# EAGLE board SOL_AMPV2 (EAGLE 7.4.0), part 1 of 2
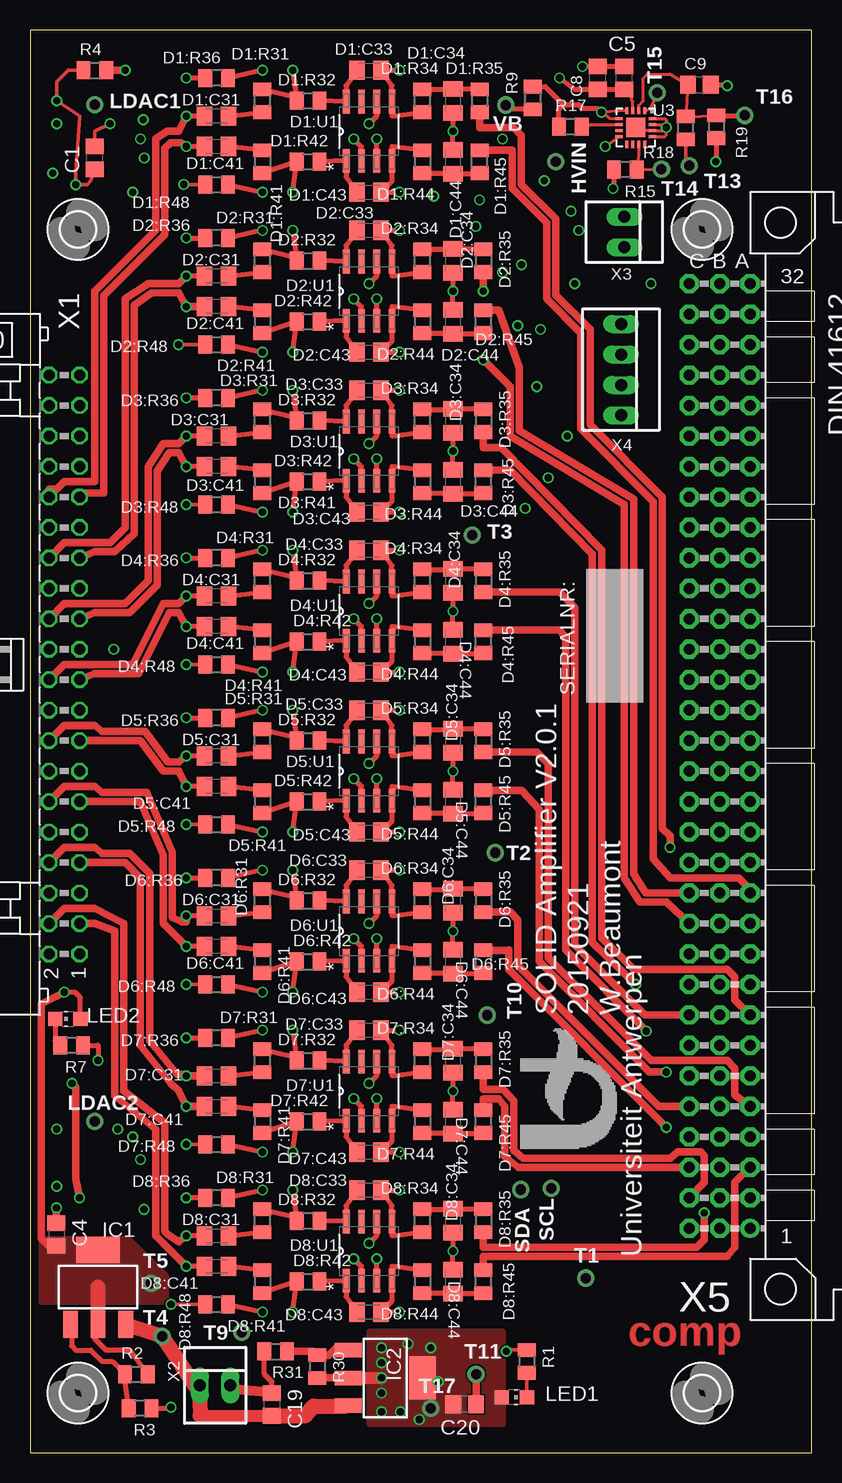
[diagram p0: board, top side]
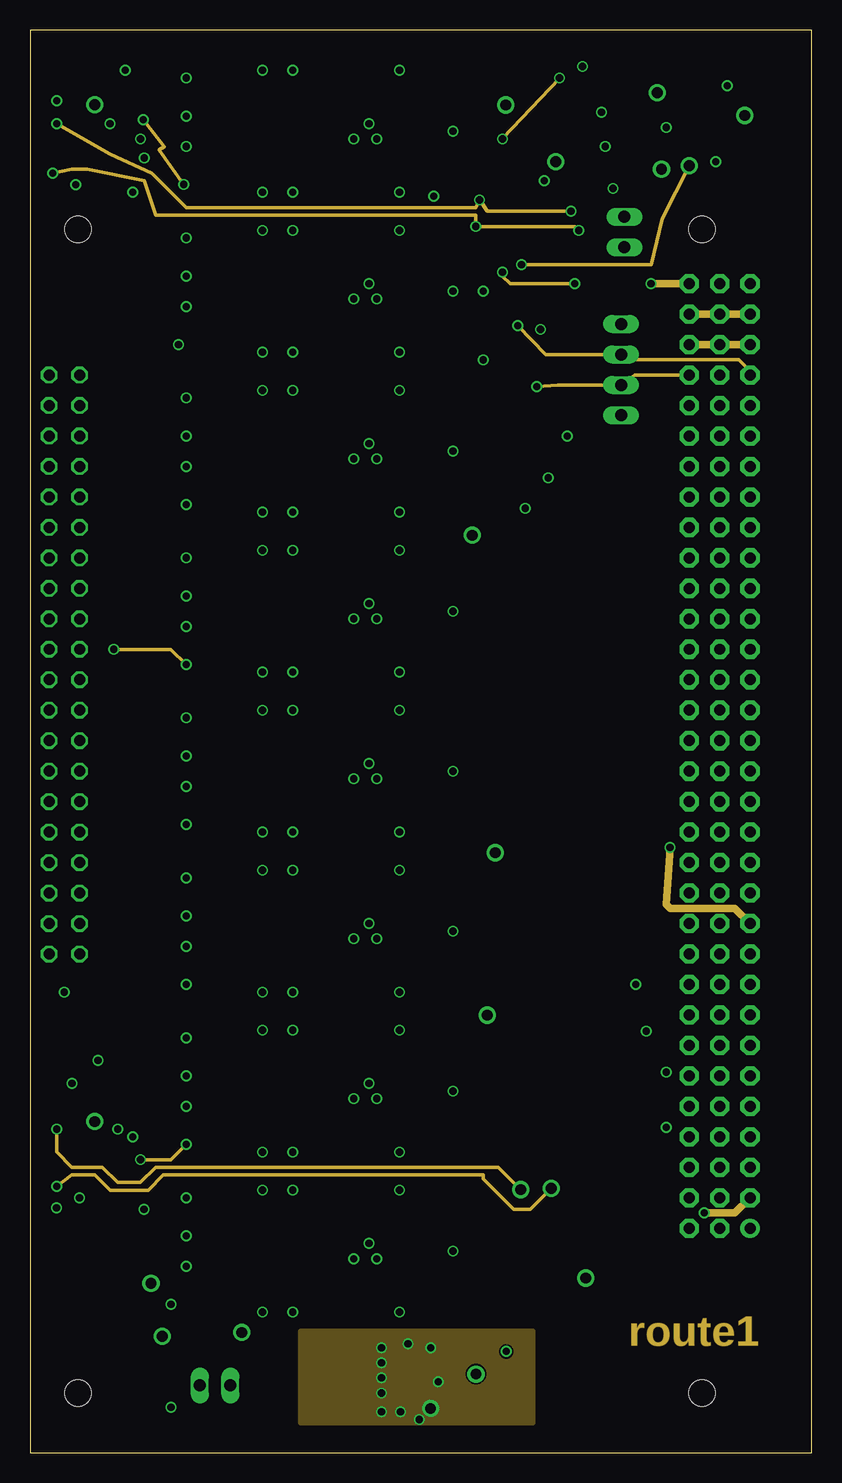
[diagram p1: board, inner layer Route2]
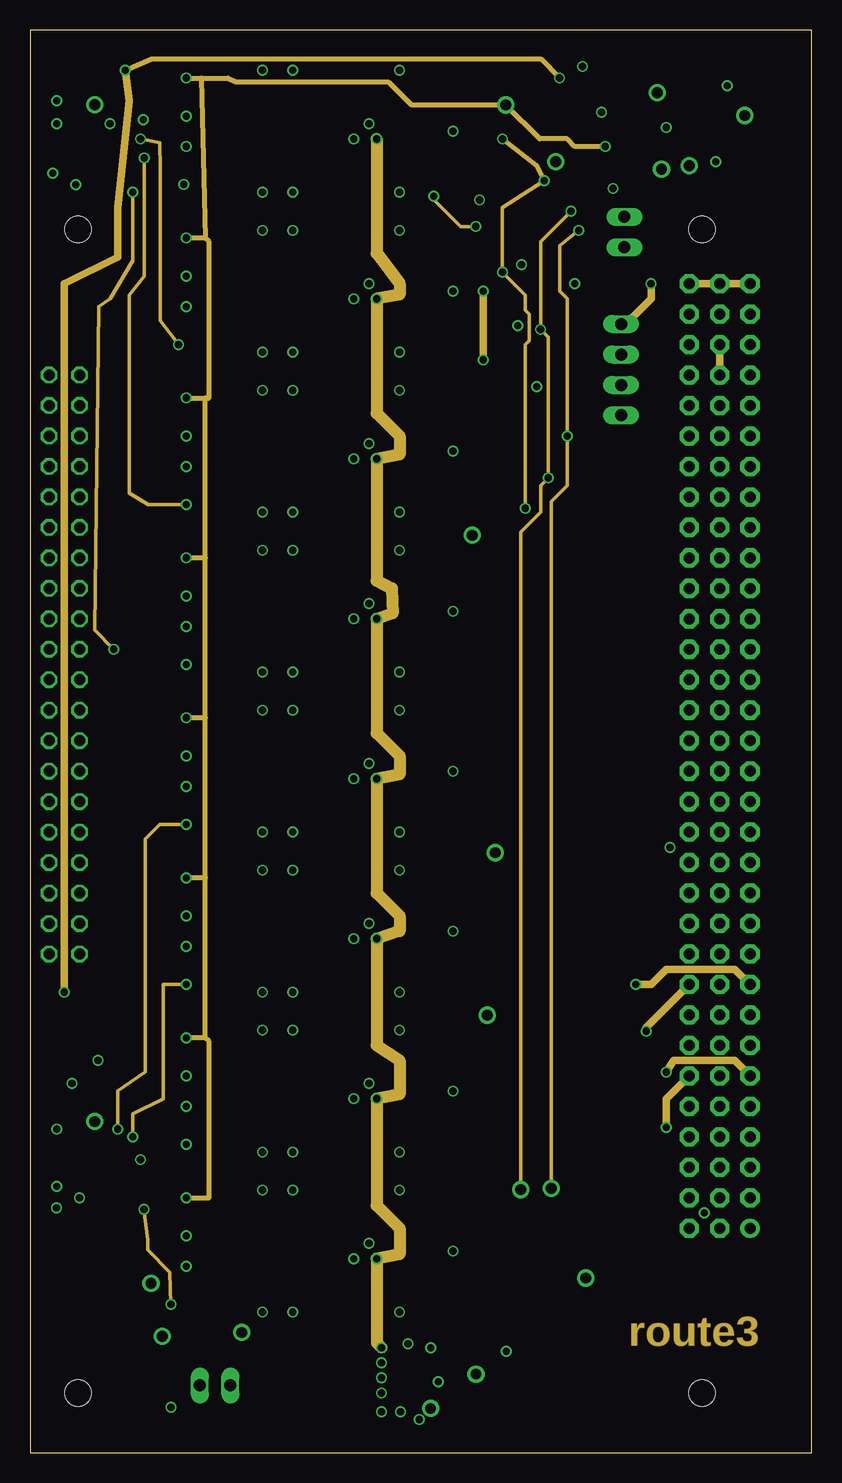
[diagram p2: board, inner layer Route3]
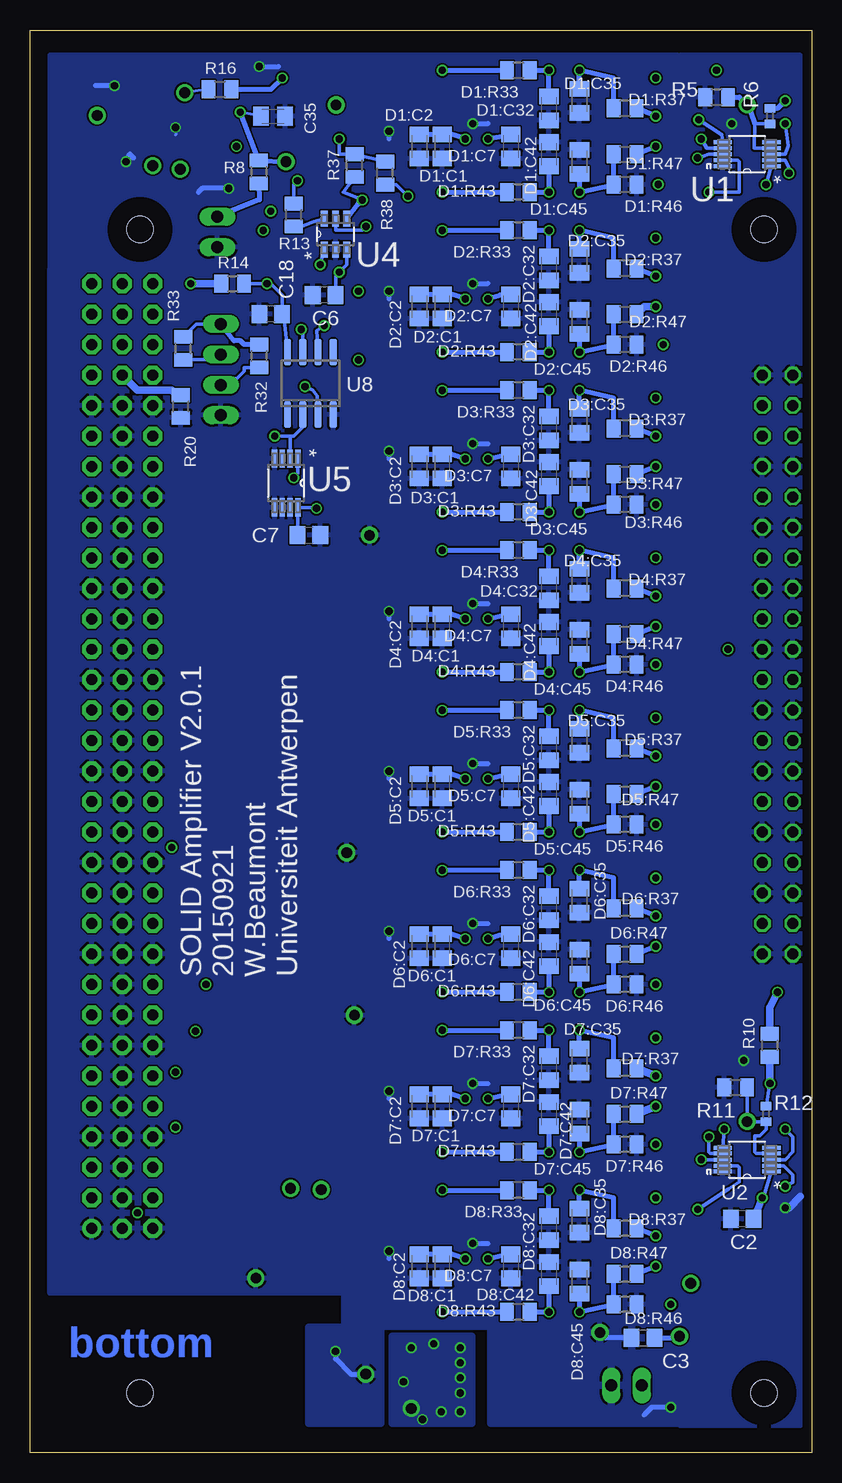
[diagram p3: board, bottom side, seen from below]

Size 65.15 x 118.62 mm. Coordinates in mm from the lower left corner, seen from the top.
Outline: 0,0 65.15,0 65.15,118.62 0,118.62 0,0
Copper layers (1+2*3+16): Top 0.018mm / dielectric 0.36mm / Route2 0.035mm / dielectric 0.71mm / Route3 0.035mm / dielectric 0.36mm / Bottom 0.018mm
Design rules "eC_4Layer_PClass6_BaseCopperO18-I35_eCDefault": minimum track width 0.15mm, minimum drill 0.35mm, track to track 0.15mm, track to pad 0.15mm, pad to pad 0.15mm, via to via 0.15mm, smd to smd 0mil, copper to edge 0.25mm, drill to drill 0.35mm, minimum pad ring 0.175mm, minimum via ring 0.125mm, stop-mask expansion 0mil, vias tented up to drill 0.45mm, thermal gap 0.2mm

## Footprints (pad centres in the part's own frame; a part is rotated, then mirrored left to right if it is on the bottom)
C0805 = smd 1.3 x 1.5: 1 -0.95,0; 2 0.95,0
C0805K = smd 1.3 x 1.6: 1 -1,0; 2 1,0
R0805H = smd 1.143 x 1.5: 1 -0.95,0; 2 0.95,0
SOIC127P600X175-8N = smd 1.981 x 0.559: 1 -2.464,1.905; 2 -2.464,0.635; 3 -2.464,-0.635; 4 -2.464,-1.905; 5 2.464,-1.905; 6 2.464,-0.635; 7 2.464,0.635; 8 2.464,1.905
2,1 = hole 2.2: 0,0
UA_P1-13 = drill 0.9 pad 1.422: TP 0,0
SOT223 = smd 1.219 x 2.235: 1 -2.311,-3.099; 2 0,-3.099; 3 2.311,-3.099 | smd 3.6 x 2.2: 4 0,3.099
CHIP-LED0805 = smd 1.2 x 1.2: A 0,-1.05; C 0,1.05
R0402 = smd 0.7 x 0.9: 1 -0.65,0; 2 0.65,0
SOP50P490X110-10N = smd 1.524 x 0.33: 1 -2.032,0.991; 2 -2.032,0.508; 3 -2.032,0; 4 -2.032,-0.508; 5 -2.032,-0.991; 6 2.032,-0.991; 7 2.032,-0.508; 8 2.032,0; 9 2.032,0.508; 10 2.032,0.991
LFCSP_LQ-16_MANSOL = smd 0.61 x 0.25: 1 -1.405,0.75; 2 -1.405,0.25; 3 -1.405,-0.25; 4 -1.405,-0.75; 9 1.405,-0.75; 10 1.405,-0.25; 11 1.405,0.25; 12 1.405,0.75 | smd 0.25 x 0.61: 5 -0.75,-1.405; 6 -0.25,-1.405; 7 0.25,-1.405; 8 0.75,-1.405; 13 0.75,1.405; 14 0.25,1.405; 15 -0.25,1.405; 16 -0.75,1.405 | smd 1.6 x 1.6: EXP 0,0
SOT95P270X145-6N = smd 1.321 x 0.559: 1 -1.295,0.94; 2 -1.295,0; 3 -1.295,-0.94; 4 1.295,-0.94; 5 1.295,0; 6 1.295,0.94
SOP65P490X110-8N = smd 1.524 x 0.457: 1 -2.032,0.965; 2 -2.032,0.33; 3 -2.032,-0.33; 4 -2.032,-0.965; 5 2.032,-0.965; 6 2.032,-0.33; 7 2.032,0.33; 8 2.032,0.965
SO8 = smd 0.6 x 2.2: 1 -1.905,-2.6; 2 -0.635,-2.6; 3 0.635,-2.6; 4 1.905,-2.6; 5 1.905,2.6; 6 0.635,2.6; 7 -0.635,2.6; 8 -1.905,2.6
ML40L = drill 0.914 octagon: 1 -24.13,-1.27; 2 -24.13,1.27; 3 -21.59,-1.27; 4 -21.59,1.27; 5 -19.05,-1.27; 6 -19.05,1.27; 7 -16.51,-1.27; 8 -16.51,1.27; 9 -13.97,-1.27; 10 -13.97,1.27; 11 -11.43,-1.27; 12 -11.43,1.27; 13 -8.89,-1.27; 14 -8.89,1.27; 15 -6.35,-1.27; 16 -6.35,1.27; 17 -3.81,-1.27; 18 -3.81,1.27; 19 -1.27,-1.27; 20 -1.27,1.27; 21 1.27,-1.27; 22 1.27,1.27; 23 3.81,-1.27; 24 3.81,1.27; 25 6.35,-1.27; 26 6.35,1.27; 27 8.89,-1.27; 28 8.89,1.27; 29 11.43,-1.27; 30 11.43,1.27; 31 13.97,-1.27; 32 13.97,1.27; 33 16.51,-1.27; 34 16.51,1.27; 35 19.05,-1.27; 36 19.05,1.27; 37 21.59,-1.27; 38 21.59,1.27; 39 24.13,-1.27; 40 24.13,1.27
22-23-2021 = drill 1 long: 1 -1.27,0; 2 1.27,0
22-23-2041 = drill 1 long: 1 -3.81,0; 2 -1.27,0; 3 1.27,0; 4 3.81,0
DIN41612_96RC = drill 0.914 pad 1.6: A1 2.54,-39.37 | drill 0.914 pad 1.6 octagon: A2 2.54,-36.83; A3 2.54,-34.29; A4 2.54,-31.75; A5 2.54,-29.21; A6 2.54,-26.67; A7 2.54,-24.13; A8 2.54,-21.59; A9 2.54,-19.05; A10 2.54,-16.51; A11 2.54,-13.97; A12 2.54,-11.43; A13 2.54,-8.89; A14 2.54,-6.35; A15 2.54,-3.81; A16 2.54,-1.27; A17 2.54,1.27; A18 2.54,3.81; A19 2.54,6.35; A20 2.54,8.89; A21 2.54,11.43; A22 2.54,13.97; A23 2.54,16.51; A24 2.54,19.05; A25 2.54,21.59; A26 2.54,24.13; A27 2.54,26.67; A28 2.54,29.21; A29 2.54,31.75; A30 2.54,34.29; A31 2.54,36.83; A32 2.54,39.37; B1 0,-39.37; B2 0,-36.83; B3 0,-34.29; B4 0,-31.75; B5 0,-29.21; B6 0,-26.67; B7 0,-24.13; B8 0,-21.59; B9 0,-19.05; B10 0,-16.51; B11 0,-13.97; B12 0,-11.43; B13 0,-8.89; B14 0,-6.35; B15 0,-3.81; B16 0,-1.27; B17 0,1.27; B18 0,3.81; B19 0,6.35; B20 0,8.89; B21 0,11.43; B22 0,13.97; B23 0,16.51; B24 0,19.05; B25 0,21.59; B26 0,24.13; B27 0,26.67; B28 0,29.21; B29 0,31.75; B30 0,34.29; B31 0,36.83; B32 0,39.37; C1 -2.54,-39.37; C2 -2.54,-36.83; C3 -2.54,-34.29; C4 -2.54,-31.75; C5 -2.54,-29.21; C6 -2.54,-26.67; C7 -2.54,-24.13; C8 -2.54,-21.59; C9 -2.54,-19.05; C10 -2.54,-16.51; C11 -2.54,-13.97; C12 -2.54,-11.43; C13 -2.54,-8.89; C14 -2.54,-6.35; C15 -2.54,-3.81; C16 -2.54,-1.27; C17 -2.54,1.27; C18 -2.54,3.81; C19 -2.54,6.35; C20 -2.54,8.89; C21 -2.54,11.43; C22 -2.54,13.97; C23 -2.54,16.51; C24 -2.54,19.05; C25 -2.54,21.59; C26 -2.54,24.13; C27 -2.54,26.67; C28 -2.54,29.21; C29 -2.54,31.75; C30 -2.54,34.29; C31 -2.54,36.83; C32 -2.54,39.37

## Placement (x,y rotation side)
C1  10u  [C0805]  5.4,107.95 90 top
C2  10u  [C0805]  5.79,19.51 180 bottom
C3  10uF  [C0805]  14.06,9.59 0 bottom
C4  10uF  [C0805]  2.21,18.22 270 top
C5  10n  [C0805]  49.53,114.62 90 top
C6  10n  [C0805]  40.64,96.52 180 bottom
C7  10n  [C0805]  41.91,76.52 0 bottom
C8  100n  [C0805]  47.31,114.62 90 top
C9  10n  [C0805]  55.78,114.05 0 top
C18  10n  [C0805]  45.09,94.93 180 bottom
C19  10uF  [C0805]  20.16,4.05 270 top
C20  10uF  [C0805]  36.22,4.05 180 top
C35  100nF /100V  [C0805K]  44.9,111.42 0 bottom
D1:C1  100n  [C0805K]  30.8,108.9 90 bottom
D1:C2  10n  [C0805K]  32.7,108.9 90 bottom
D1:C7  10n  [C0805K]  25.08,108.9 270 bottom
D1:C31  4.4n/100V  [C0805K]  15.56,111.44 180 top
D1:C32  152p  [C0805K]  21.91,112.08 90 bottom
D1:C33  21p  [C0805K]  28.26,115.25 0 top
D1:C34  x  [C0805K]  35.24,112.71 90 top
D1:C35  100nF /100V  [C0805K]  19.37,112.71 270 bottom
D1:C41  4.4n  [C0805K]  15.56,108.9 180 top
D1:C42  152p  [C0805K]  21.91,108.27 270 bottom
D1:C43  21p  [C0805K]  28.26,105.09 0 top
D1:C44  x  [C0805K]  35.24,107.63 270 top
D1:C45  100nF /100V  [C0805K]  19.37,107.63 90 bottom
D1:R31  27  [R0805H]  19.37,112.71 90 top
D1:R32  24  [R0805H]  23.18,112.71 0 top
D1:R33  3K  [R0805H]  24.45,115.25 180 bottom
D1:R34  1  [R0805H]  32.7,112.71 90 top
D1:R35  1  [R0805H]  37.47,112.71 270 top
D1:R36  10K  [R0805H]  15.56,114.62 180 top
D1:R37  100K  [R0805H]  15.56,112.08 180 bottom
D1:R41  27  [R0805H]  19.37,107.63 270 top
D1:R42  24  [R0805H]  23.18,107.63 0 top
D1:R43  3K  [R0805H]  24.45,105.09 180 bottom
D1:R44  1  [R0805H]  32.7,107.63 270 top
D1:R45  1  [R0805H]  37.47,107.63 90 top
D1:R46  10K  [R0805H]  15.56,105.73 180 bottom
D1:R47  100K  [R0805H]  15.56,108.27 0 bottom
D1:R48  470  [R0805H]  15.56,105.73 0 top
D1:U1  AD8132ARZ  [SOIC127P600X175-8N]  28.26,110.17 90 top
D2:C1  100n  [C0805K]  30.8,95.57 90 bottom
D2:C2  10n  [C0805K]  32.7,95.57 90 bottom
D2:C7  10n  [C0805K]  25.08,95.57 270 bottom
D2:C31  4.4n/100V  [C0805K]  15.56,98.11 180 top
D2:C32  152p  [C0805K]  21.91,98.74 90 bottom
D2:C33  21p  [C0805K]  28.26,101.92 0 top
D2:C34  x  [C0805K]  35.24,99.38 90 top
D2:C35  100nF /100V  [C0805K]  19.37,99.38 270 bottom
D2:C41  4.4n  [C0805K]  15.56,95.57 180 top
D2:C42  152p  [C0805K]  21.91,94.93 270 bottom
D2:C43  21p  [C0805K]  28.26,91.76 0 top
D2:C44  x  [C0805K]  35.24,94.3 270 top
D2:C45  100nF /100V  [C0805K]  19.37,94.3 90 bottom
D2:R31  27  [R0805H]  19.37,99.38 90 top
D2:R32  24  [R0805H]  23.18,99.38 0 top
D2:R33  3K  [R0805H]  24.45,101.92 180 bottom
D2:R34  1  [R0805H]  32.7,99.38 90 top
D2:R35  1  [R0805H]  37.78,99.38 270 top
D2:R36  10K  [R0805H]  15.56,101.28 180 top
D2:R37  100K  [R0805H]  15.56,98.74 180 bottom
D2:R41  27  [R0805H]  19.37,94.3 270 top
D2:R42  24  [R0805H]  23.18,94.3 0 top
D2:R43  3K  [R0805H]  24.45,91.76 180 bottom
D2:R44  1  [R0805H]  32.7,94.3 270 top
D2:R45  1  [R0805H]  37.78,94.3 90 top
D2:R46  10K  [R0805H]  15.56,92.39 180 bottom
D2:R47  100K  [R0805H]  15.56,94.93 0 bottom
D2:R48  470  [R0805H]  15.56,92.39 0 top
D2:U1  AD8132ARZ  [SOIC127P600X175-8N]  28.26,96.84 90 top
D3:C1  100n  [C0805K]  30.8,82.23 90 bottom
D3:C2  10n  [C0805K]  32.7,82.23 90 bottom
D3:C7  10n  [C0805K]  25.08,82.23 270 bottom
D3:C31  4.4n/100V  [C0805K]  15.56,84.77 180 top
D3:C32  152p  [C0805K]  21.91,85.41 90 bottom
D3:C33  21p  [C0805K]  28.26,88.58 0 top
D3:C34  x  [C0805K]  35.24,86.04 90 top
D3:C35  100nF /100V  [C0805K]  19.37,86.04 270 bottom
D3:C41  4.4n  [C0805K]  15.56,82.23 180 top
D3:C42  152p  [C0805K]  21.91,81.6 270 bottom
D3:C43  21p  [C0805K]  28.26,78.42 0 top
D3:C44  x  [C0805K]  35.24,80.96 270 top
D3:C45  100nF /100V  [C0805K]  19.37,80.96 90 bottom
D3:R31  27  [R0805H]  19.37,86.04 90 top
D3:R32  24  [R0805H]  23.18,86.04 0 top
D3:R33  3K  [R0805H]  24.45,88.58 180 bottom
D3:R34  1  [R0805H]  32.7,86.04 90 top
D3:R35  1  [R0805H]  37.78,86.04 270 top
D3:R36  10K  [R0805H]  15.56,87.95 180 top
D3:R37  100K  [R0805H]  15.56,85.41 180 bottom
D3:R41  27  [R0805H]  19.37,80.96 270 top
D3:R42  24  [R0805H]  23.18,80.96 0 top
D3:R43  3K  [R0805H]  24.45,78.42 180 bottom
D3:R44  1  [R0805H]  32.7,80.96 270 top
D3:R45  1  [R0805H]  37.78,80.96 90 top
D3:R46  10K  [R0805H]  15.56,79.06 180 bottom
D3:R47  100K  [R0805H]  15.56,81.6 0 bottom
D3:R48  470  [R0805H]  15.56,79.06 0 top
D3:U1  AD8132ARZ  [SOIC127P600X175-8N]  28.26,83.5 90 top
D4:C1  100n  [C0805K]  30.8,68.9 90 bottom
D4:C2  10n  [C0805K]  32.7,68.9 90 bottom
D4:C7  10n  [C0805K]  25.08,68.9 270 bottom
D4:C31  4.4n/100V  [C0805K]  15.56,71.44 180 top
D4:C32  152p  [C0805K]  21.91,72.07 90 bottom
D4:C33  21p  [C0805K]  28.26,75.25 0 top
D4:C34  x  [C0805K]  35.24,72.71 90 top
D4:C35  100nF /100V  [C0805K]  19.37,72.71 270 bottom
D4:C41  4.4n  [C0805K]  15.56,68.9 180 top
D4:C42  152p  [C0805K]  21.91,68.26 270 bottom
D4:C43  21p  [C0805K]  28.26,65.09 0 top
D4:C44  x  [C0805K]  35.24,67.63 270 top
D4:C45  100nF /100V  [C0805K]  19.37,67.63 90 bottom
D4:R31  27  [R0805H]  19.37,72.71 90 top
D4:R32  24  [R0805H]  23.18,72.71 0 top
D4:R33  3K  [R0805H]  24.45,75.25 180 bottom
D4:R34  1  [R0805H]  32.7,72.71 90 top
D4:R35  1  [R0805H]  37.78,72.71 270 top
D4:R36  10K  [R0805H]  15.56,74.61 180 top
D4:R37  100K  [R0805H]  15.56,72.07 180 bottom
D4:R41  27  [R0805H]  19.37,67.63 270 top
D4:R42  24  [R0805H]  23.18,67.63 0 top
D4:R43  3K  [R0805H]  24.45,65.09 180 bottom
D4:R44  1  [R0805H]  32.7,67.63 270 top
D4:R45  1  [R0805H]  37.78,67.63 90 top
D4:R46  10K  [R0805H]  15.56,65.72 180 bottom
D4:R47  100K  [R0805H]  15.56,68.26 0 bottom
D4:R48  470  [R0805H]  15.56,65.72 0 top
D4:U1  AD8132ARZ  [SOIC127P600X175-8N]  28.26,70.17 90 top
D5:C1  100n  [C0805K]  30.8,55.56 90 bottom
D5:C2  10n  [C0805K]  32.7,55.56 90 bottom
D5:C7  10n  [C0805K]  25.08,55.56 270 bottom
D5:C31  4.4n/100V  [C0805K]  15.56,58.1 180 top
D5:C32  152p  [C0805K]  21.91,58.74 90 bottom
D5:C33  21p  [C0805K]  28.26,61.91 0 top
D5:C34  x  [C0805K]  35.24,59.37 90 top
D5:C35  100nF /100V  [C0805K]  19.37,59.37 270 bottom
D5:C41  4.4n  [C0805K]  15.56,55.56 180 top
D5:C42  152p  [C0805K]  21.91,54.93 270 bottom
D5:C43  21p  [C0805K]  28.26,51.75 0 top
D5:C44  x  [C0805K]  35.24,54.29 270 top
D5:C45  100nF /100V  [C0805K]  19.37,54.29 90 bottom
D5:R31  27  [R0805H]  19.37,59.37 90 top
D5:R32  24  [R0805H]  23.18,59.37 0 top
D5:R33  3K  [R0805H]  24.45,61.91 180 bottom
D5:R34  1  [R0805H]  32.7,59.37 90 top
D5:R35  1  [R0805H]  37.78,59.37 270 top
D5:R36  10K  [R0805H]  15.56,61.28 180 top
D5:R37  100K  [R0805H]  15.56,58.74 180 bottom
D5:R41  27  [R0805H]  19.37,54.29 270 top
D5:R42  24  [R0805H]  23.18,54.29 0 top
D5:R43  3K  [R0805H]  24.45,51.75 180 bottom
D5:R44  1  [R0805H]  32.7,54.29 270 top
D5:R45  1  [R0805H]  37.78,54.29 90 top
D5:R46  10K  [R0805H]  15.56,52.39 180 bottom
D5:R47  100K  [R0805H]  15.56,54.93 0 bottom
D5:R48  470  [R0805H]  15.56,52.39 0 top
D5:U1  AD8132ARZ  [SOIC127P600X175-8N]  28.26,56.83 90 top
D6:C1  100n  [C0805K]  30.8,42.23 90 bottom
D6:C2  10n  [C0805K]  32.7,42.23 90 bottom
D6:C7  10n  [C0805K]  25.08,42.23 270 bottom
D6:C31  4.4n/100V  [C0805K]  15.56,44.77 180 top
D6:C32  152p  [C0805K]  21.91,45.4 90 bottom
D6:C33  21p  [C0805K]  28.26,48.58 0 top
D6:C34  x  [C0805K]  35.24,46.04 90 top
D6:C35  100nF /100V  [C0805K]  19.37,46.04 270 bottom
D6:C41  4.4n  [C0805K]  15.56,42.23 180 top
D6:C42  152p  [C0805K]  21.91,41.59 270 bottom
D6:C43  21p  [C0805K]  28.26,38.42 0 top
D6:C44  x  [C0805K]  35.24,40.96 270 top
D6:C45  100nF /100V  [C0805K]  19.37,40.96 90 bottom
D6:R31  27  [R0805H]  19.37,46.04 90 top
D6:R32  24  [R0805H]  23.18,46.04 0 top
D6:R33  3K  [R0805H]  24.45,48.58 180 bottom
D6:R34  1  [R0805H]  32.7,46.04 90 top
D6:R35  1  [R0805H]  37.78,46.04 270 top
D6:R36  10K  [R0805H]  15.56,47.94 180 top
D6:R37  100K  [R0805H]  15.56,45.4 180 bottom
D6:R41  27  [R0805H]  19.37,40.96 270 top
D6:R42  24  [R0805H]  23.18,40.96 0 top
D6:R43  3K  [R0805H]  24.45,38.42 180 bottom
D6:R44  1  [R0805H]  32.7,40.96 270 top
D6:R45  1  [R0805H]  37.78,40.96 90 top
D6:R46  10K  [R0805H]  15.56,39.05 180 bottom
D6:R47  100K  [R0805H]  15.56,41.59 0 bottom
D6:R48  470  [R0805H]  15.56,39.05 0 top
D6:U1  AD8132ARZ  [SOIC127P600X175-8N]  28.26,43.5 90 top
D7:C1  100n  [C0805K]  30.8,28.89 90 bottom
D7:C2  10n  [C0805K]  32.7,28.89 90 bottom
D7:C7  10n  [C0805K]  25.08,28.89 270 bottom
D7:C31  4.4n/100V  [C0805K]  15.56,31.43 180 top
D7:C32  152p  [C0805K]  21.91,32.07 90 bottom
D7:C33  21p  [C0805K]  28.26,35.24 0 top
D7:C34  x  [C0805K]  35.24,32.7 90 top
D7:C35  100nF /100V  [C0805K]  19.37,32.7 270 bottom
D7:C41  4.4n  [C0805K]  15.56,28.89 180 top
D7:C42  152p  [C0805K]  21.91,28.26 270 bottom
D7:C43  21p  [C0805K]  28.26,25.08 0 top
D7:C44  x  [C0805K]  35.24,27.62 270 top
D7:C45  100nF /100V  [C0805K]  19.37,27.62 90 bottom
D7:R31  27  [R0805H]  19.37,32.7 90 top
D7:R32  24  [R0805H]  23.18,32.7 0 top
D7:R33  3K  [R0805H]  24.45,35.24 180 bottom
D7:R34  1  [R0805H]  32.7,32.7 90 top
D7:R35  1  [R0805H]  37.78,32.7 270 top
D7:R36  10K  [R0805H]  15.56,34.61 180 top
D7:R37  100K  [R0805H]  15.56,32.07 180 bottom
D7:R41  27  [R0805H]  19.37,27.62 270 top
D7:R42  24  [R0805H]  23.18,27.62 0 top
D7:R43  3K  [R0805H]  24.45,25.08 180 bottom
D7:R44  1  [R0805H]  32.7,27.62 270 top
D7:R45  1  [R0805H]  37.78,27.62 90 top
D7:R46  10K  [R0805H]  15.56,25.72 180 bottom
D7:R47  100K  [R0805H]  15.56,28.26 0 bottom
D7:R48  470  [R0805H]  15.56,25.72 0 top
D7:U1  AD8132ARZ  [SOIC127P600X175-8N]  28.26,30.16 90 top
D8:C1  100n  [C0805K]  30.8,15.56 90 bottom
D8:C2  10n  [C0805K]  32.7,15.56 90 bottom
D8:C7  10n  [C0805K]  25.08,15.56 270 bottom
D8:C31  4.4n/100V  [C0805K]  15.56,18.1 180 top
D8:C32  152p  [C0805K]  21.91,18.73 90 bottom
D8:C33  21p  [C0805K]  28.26,21.91 0 top
D8:C34  x  [C0805K]  35.24,19.37 90 top
D8:C35  100nF /100V  [C0805K]  19.37,19.37 270 bottom
D8:C41  4.4n  [C0805K]  15.56,15.56 180 top
D8:C42  152p  [C0805K]  21.91,14.92 270 bottom
D8:C43  21p  [C0805K]  28.26,11.75 0 top
D8:C44  x  [C0805K]  35.24,14.29 270 top
D8:C45  100nF /100V  [C0805K]  19.37,14.29 90 bottom
D8:R31  27  [R0805H]  19.37,19.37 90 top
D8:R32  24  [R0805H]  23.18,19.37 0 top
D8:R33  3K  [R0805H]  24.45,21.91 180 bottom
D8:R34  1  [R0805H]  32.7,19.37 90 top
D8:R35  1  [R0805H]  37.78,19.37 270 top
D8:R36  10K  [R0805H]  15.56,21.27 180 top
D8:R37  100K  [R0805H]  15.56,18.73 180 bottom
D8:R41  27  [R0805H]  19.37,14.29 270 top
D8:R42  24  [R0805H]  23.18,14.29 0 top
D8:R43  3K  [R0805H]  24.45,11.75 180 bottom
D8:R44  1  [R0805H]  32.7,14.29 270 top
D8:R45  1  [R0805H]  37.78,14.29 90 top
D8:R46  10K  [R0805H]  15.56,12.38 180 bottom
D8:R47  100K  [R0805H]  15.56,14.92 0 bottom
D8:R48  470  [R0805H]  15.56,12.38 0 top
D8:U1  AD8132ARZ  [SOIC127P600X175-8N]  28.26,16.83 90 top
H1  [2,1]  4,5 0 top
H2  [2,1]  56,5 0 top
H3  [2,1]  4,102 0 top
H4  [2,1]  56,102 0 top
HVIN  UA_TPPAD1-13  [UA_P1-13]  43.81,107.63 0 top
IC1  LM1117  [SOT223]  5.67,13.82 0 top
IC2  LM1117  [SOT223]  29.61,6.26 270 top
LDAC1  UA_TPPAD1-13  [UA_P1-13]  5.4,112.39 0 top
LDAC2  UA_TPPAD1-13  [UA_P1-13]  5.4,27.62 0 top
LED1  HSMY-C170  [CHIP-LED0805]  40.36,4.64 270 top
LED2  HSMY-C170  [CHIP-LED0805]  3.15,36.18 90 top
M1  [UA]  45.09,29.21 90 top
R1  1K  [R0805H]  41.4,7.63 270 top
R2  330E  [R0805H]  8.86,6.57 0 top
R3  1K  [R0805H]  9.17,3.73 180 top
R4  10E  [R0805H]  5.4,115.25 0 top
R5  4.7K  [R0805H]  7.94,113.03 0 bottom
R6  NC  [R0402]  3.49,111.44 90 bottom
R7  1K  [R0805H]  3.47,33.97 180 top
R8  1K  [R0805H]  46.09,106.79 270 bottom
R9  NC  [R0805H]  41.91,112.95 90 top
R10  10  [R0805H]  3.49,33.97 90 bottom
R11  4.7K  [R0805H]  6.35,30.48 0 bottom
R12  NC  [R0402]  3.81,28.26 90 bottom
R13  4K7  [R0805H]  43.18,103.19 90 bottom
R14  NC  [R0805H]  48.26,97.47 0 bottom
R15  27K  [R0805H]  49.62,106.96 180 top
R16  1K  [R0805H]  49.32,113.67 0 bottom
R17  NC  [R0805H]  45.03,110.57 0 top
R18  1K  [R0805H]  54.65,110.45 90 top
R19  2.4K  [R0805H]  57.19,110.54 270 top
R20  0  [R0805H]  52.58,87.24 90 bottom
R30  330E  [R0805H]  23.94,7.2 270 top
R31  1K  [R0805H]  20.47,8.46 0 top
R32  4K7  [R0805H]  46.04,91.44 90 bottom
R33  4K7  [R0805H]  52.39,92.08 90 bottom
R37  4K7  [R0805H]  38.1,107.31 90 bottom
R38  4K7  [R0805H]  35.56,106.68 90 bottom
SCL  UA_TPPAD1-13  [UA_P1-13]  43.44,22.06 0 top
SDA  UA_TPPAD1-13  [UA_P1-13]  40.89,21.95 0 top
T1  UA_TPPAD1-13  [UA_P1-13]  46.32,14.57 0 top
T2  UA_TPPAD1-13  [UA_P1-13]  38.76,50.04 0 top
T3  UA_TPPAD1-13  [UA_P1-13]  36.86,76.5 0 top
T4  UA_TPPAD1-13  [UA_P1-13]  11.03,9.73 0 top
T5  UA_TPPAD1-13  [UA_P1-13]  10.08,14.13 0 top
T9  UA_TPPAD1-13  [UA_P1-13]  17.65,10.04 0 top
T10  UA_TPPAD1-13  [UA_P1-13]  38.11,36.49 0 top
T11  UA_TPPAD1-13  [UA_P1-13]  37.17,6.57 0 top
T13  UA_TPPAD1-13  [UA_P1-13]  54.93,107.31 0 top
T14  UA_TPPAD1-13  [UA_P1-13]  52.62,107.01 0 top
T15  UA_TPPAD1-13  [UA_P1-13]  52.26,113.39 0 top
T16  UA_TPPAD1-13  [UA_P1-13]  59.56,111.5 0 top
T17  UA_TPPAD1-13  [UA_P1-13]  33.38,3.71 0 top
U1  MCP4728-E/UN  [SOP50P490X110-10N]  5.4,108.27 180 bottom
U2  MCP4728-E/UN  [SOP50P490X110-10N]  5.4,24.45 180 bottom
U3  ADL5317  [LFCSP_LQ-16_MANSOL]  50.48,110.49 270 top
U4  MCP4725A0T-E/CH  [SOT95P270X145-6N]  39.69,101.6 90 bottom
U5  MCP9808-E/MS  [SOP65P490X110-8N]  43.8,80.85 270 bottom
U8  P82B715TD  [SO8]  41.79,89.16 0 bottom
VB  UA_TPPAD1-13  [UA_P1-13]  39.64,112.37 0 top
X1  40pin  [ML40L]  2.86,65.72 90 top
X2  22-23-2021  [22-23-2021]  15.44,5.63 0 top
X3  22-23-2021  [22-23-2021]  49.53,101.78 270 top
X4  22-23-2041  [22-23-2041]  49.25,90.3 270 top
X5  DIN41612_ABC_96_R  [DIN41612_96RC]  57.47,58.1 0 top

## Library data of the parts
C1 C2 C35 D1:C1 D1:C2 D1:C7 D1:C31-D1:C35 D1:C41-D1:C45 D2:C1 D2:C2 D2:C7 D2:C31-D2:C35 D2:C41-D2:C45 D3:C1 D3:C2 D3:C7 D3:C31-D3:C35 D3:C41-D3:C45 D4:C1 D4:C2 D4:C7 D4:C31-D4:C35 D4:C41-D4:C45 D5:C1 D5:C2 D5:C7 D5:C31-D5:C35 D5:C41-D5:C45 D6:C1 D6:C2 D6:C7 D6:C31-D6:C35 D6:C41-D6:C45 D7:C1 D7:C2 D7:C7 D7:C31-D7:C35 D7:C41-D7:C45 D8:C1 D8:C2 D8:C7 D8:C31-D8:C35 D8:C41-D8:C45 = rcl
C3-C9 C18-C20 = rcl; PARTNO: *
D1:R31-D1:R37 D1:R41-D1:R48 D2:R31-D2:R37 D2:R41-D2:R48 D3:R31-D3:R37 D3:R41-D3:R48 D4:R31-D4:R37 D4:R41-D4:R48 D5:R31-D5:R37 D5:R41-D5:R48 D6:R31-D6:R37 D6:R41-D6:R48 D7:R31-D7:R37 D7:R41-D7:R48 D8:R31-D8:R37 D8:R41-D8:R48 M1 R4 R5 R10 R11 = UA_v2
D1:U1 D2:U1 D3:U1 D4:U1 D5:U1 D6:U1 D7:U1 D8:U1 = ua_cmp; MPN: AD8132ARZ; OC_FARNELL: 9426043; OC_NEWARK: 19M8885; PACKAGE: SOIC-8; SUPPLIER: Analog Devices
H1-H4 = ua_cmp
HVIN LDAC1 LDAC2 R1-R3 R7-R9 R13-R20 R30-R33 R37 R38 SCL SDA T1-T5 T9-T11 T13-T17 VB = UA_v2; PARTNO: *
IC1 IC2 = SparkFunEagle-6-6-07
LED1 LED2 = led
R6 R12 = resistor
U1 U2 = MCP4728; MPN: MCP4728-E/UN; OC_FARNELL: 1800217; OC_NEWARK: 08R1808; PACKAGE: MSOP-10; SUPPLIER: MICROCHIP
U3 = adl783; OC_FARNELL: 2462433
U4 = MCP4725A0T; MPN: MCP4725A0T-E/CH; OC_FARNELL: 1578449; OC_NEWARK: 77M3032; PACKAGE: SOT-23-6; SUPPLIER: Microchip
U5 = MCP4725A0T; MPN: MCP9808-E/MS; OC_FARNELL: 2080523; OC_NEWARK: 89T8871; PACKAGE: MSOP-8; SUPPLIER: MICROCHIP
U8 = UA_v2; PARTNO: P82B715TD,112
X1 = con-harting-ml; OC_FARNELL: unknown; OC_NEWARK: unknown
X2 X3 = con-molex; MF: MOLEX; MPN: 22-23-2021; OC_FARNELL: 1462926; OC_NEWARK: 25C3832
X4 = con-molex; MF: MOLEX; MPN: 22-23-2041; OC_FARNELL: 1462920; OC_NEWARK: 38C0355
X5 = con3

## Nets
BIASSET: C9.1 R18.2 R19.1 T16.TP U3.2
BIASTRSET: R18.1 T13.TP U4.1
D1:AOUT+: D1:C43.2 D1:R43.2 D1:R44.1 D1:U1.4
D1:AOUT-: D1:C33.2 D1:R33.2 D1:R34.1 D1:U1.5
D1:FB+: D1:C32.2 D1:R31.2 D1:R32.1 D1:R33.1
D1:FB-: D1:C42.2 D1:R41.2 D1:R42.1 D1:R43.1
D1:N$1: D1:C34.2 D1:R34.2 D1:R35.1
D1:N$2: D1:C7.1 D1:U1.2
D1:N$3: D1:C44.2 D1:R44.2 D1:R45.1
D1:N$4: D1:C43.1 D1:R42.2 D1:U1.1
D1:N$5: D1:C33.1 D1:R32.2 D1:U1.8
D1:N$10: D1:C41.1 D1:R41.1
D1:R31: D1:C31.1 D1:R31.1
D1:VB+: D1:C35.1 D1:R36.1 D1:R37.2
D1:VB-: D1:C45.1 D1:R46.2 D1:R47.1 D1:R48.2
D2:AOUT+: D2:C43.2 D2:R43.2 D2:R44.1 D2:U1.4
D2:AOUT-: D2:C33.2 D2:R33.2 D2:R34.1 D2:U1.5
D2:FB+: D2:C32.2 D2:R31.2 D2:R32.1 D2:R33.1
D2:FB-: D2:C42.2 D2:R41.2 D2:R42.1 D2:R43.1
D2:N$1: D2:C34.2 D2:R34.2 D2:R35.1
D2:N$2: D2:C7.1 D2:U1.2
D2:N$3: D2:C44.2 D2:R44.2 D2:R45.1
D2:N$4: D2:C43.1 D2:R42.2 D2:U1.1
D2:N$5: D2:C33.1 D2:R32.2 D2:U1.8
D2:N$10: D2:C41.1 D2:R41.1
D2:R31: D2:C31.1 D2:R31.1
D2:VB+: D2:C35.1 D2:R36.1 D2:R37.2
D2:VB-: D2:C45.1 D2:R46.2 D2:R47.1 D2:R48.2
D3:AOUT+: D3:C43.2 D3:R43.2 D3:R44.1 D3:U1.4
D3:AOUT-: D3:C33.2 D3:R33.2 D3:R34.1 D3:U1.5
D3:FB+: D3:C32.2 D3:R31.2 D3:R32.1 D3:R33.1
D3:FB-: D3:C42.2 D3:R41.2 D3:R42.1 D3:R43.1
D3:N$1: D3:C34.2 D3:R34.2 D3:R35.1
D3:N$2: D3:C7.1 D3:U1.2
D3:N$3: D3:C44.2 D3:R44.2 D3:R45.1
D3:N$4: D3:C43.1 D3:R42.2 D3:U1.1
D3:N$5: D3:C33.1 D3:R32.2 D3:U1.8
D3:N$10: D3:C41.1 D3:R41.1
D3:R31: D3:C31.1 D3:R31.1
D3:VB+: D3:C35.1 D3:R36.1 D3:R37.2
D3:VB-: D3:C45.1 D3:R46.2 D3:R47.1 D3:R48.2
D4:AOUT+: D4:C43.2 D4:R43.2 D4:R44.1 D4:U1.4
D4:AOUT-: D4:C33.2 D4:R33.2 D4:R34.1 D4:U1.5
D4:FB+: D4:C32.2 D4:R31.2 D4:R32.1 D4:R33.1
D4:FB-: D4:C42.2 D4:R41.2 D4:R42.1 D4:R43.1
D4:N$1: D4:C34.2 D4:R34.2 D4:R35.1
D4:N$2: D4:C7.1 D4:U1.2
D4:N$3: D4:C44.2 D4:R44.2 D4:R45.1
D4:N$4: D4:C43.1 D4:R42.2 D4:U1.1
D4:N$5: D4:C33.1 D4:R32.2 D4:U1.8
D4:N$10: D4:C41.1 D4:R41.1
D4:R31: D4:C31.1 D4:R31.1
D4:VB+: D4:C35.1 D4:R36.1 D4:R37.2
D4:VB-: D4:C45.1 D4:R46.2 D4:R47.1 D4:R48.2
D5:AOUT+: D5:C43.2 D5:R43.2 D5:R44.1 D5:U1.4
D5:AOUT-: D5:C33.2 D5:R33.2 D5:R34.1 D5:U1.5
D5:FB+: D5:C32.2 D5:R31.2 D5:R32.1 D5:R33.1
D5:FB-: D5:C42.2 D5:R41.2 D5:R42.1 D5:R43.1
D5:N$1: D5:C34.2 D5:R34.2 D5:R35.1
D5:N$2: D5:C7.1 D5:U1.2
D5:N$3: D5:C44.2 D5:R44.2 D5:R45.1
D5:N$4: D5:C43.1 D5:R42.2 D5:U1.1
D5:N$5: D5:C33.1 D5:R32.2 D5:U1.8
D5:N$10: D5:C41.1 D5:R41.1
D5:R31: D5:C31.1 D5:R31.1
D5:VB+: D5:C35.1 D5:R36.1 D5:R37.2
D5:VB-: D5:C45.1 D5:R46.2 D5:R47.1 D5:R48.2
D6:AOUT+: D6:C43.2 D6:R43.2 D6:R44.1 D6:U1.4
D6:AOUT-: D6:C33.2 D6:R33.2 D6:R34.1 D6:U1.5
D6:FB+: D6:C32.2 D6:R31.2 D6:R32.1 D6:R33.1
D6:FB-: D6:C42.2 D6:R41.2 D6:R42.1 D6:R43.1
D6:N$1: D6:C34.2 D6:R34.2 D6:R35.1
D6:N$2: D6:C7.1 D6:U1.2
D6:N$3: D6:C44.2 D6:R44.2 D6:R45.1
D6:N$4: D6:C43.1 D6:R42.2 D6:U1.1
D6:N$5: D6:C33.1 D6:R32.2 D6:U1.8
D6:N$10: D6:C41.1 D6:R41.1
D6:R31: D6:C31.1 D6:R31.1
D6:VB+: D6:C35.1 D6:R36.1 D6:R37.2
D6:VB-: D6:C45.1 D6:R46.2 D6:R47.1 D6:R48.2
D7:AOUT+: D7:C43.2 D7:R43.2 D7:R44.1 D7:U1.4
D7:AOUT-: D7:C33.2 D7:R33.2 D7:R34.1 D7:U1.5
D7:FB+: D7:C32.2 D7:R31.2 D7:R32.1 D7:R33.1
D7:FB-: D7:C42.2 D7:R41.2 D7:R42.1 D7:R43.1
D7:N$1: D7:C34.2 D7:R34.2 D7:R35.1
D7:N$2: D7:C7.1 D7:U1.2
D7:N$3: D7:C44.2 D7:R44.2 D7:R45.1
D7:N$4: D7:C43.1 D7:R42.2 D7:U1.1
D7:N$5: D7:C33.1 D7:R32.2 D7:U1.8
D7:N$10: D7:C41.1 D7:R41.1
D7:R31: D7:C31.1 D7:R31.1
D7:VB+: D7:C35.1 D7:R36.1 D7:R37.2
D7:VB-: D7:C45.1 D7:R46.2 D7:R47.1 D7:R48.2
D8:AOUT+: D8:C43.2 D8:R43.2 D8:R44.1 D8:U1.4
D8:AOUT-: D8:C33.2 D8:R33.2 D8:R34.1 D8:U1.5
D8:FB+: D8:C32.2 D8:R31.2 D8:R32.1 D8:R33.1
D8:FB-: D8:C42.2 D8:R41.2 D8:R42.1 D8:R43.1
D8:N$1: D8:C34.2 D8:R34.2 D8:R35.1
D8:N$2: D8:C7.1 D8:U1.2
D8:N$3: D8:C44.2 D8:R44.2 D8:R45.1
D8:N$4: D8:C43.1 D8:R42.2 D8:U1.1
D8:N$5: D8:C33.1 D8:R32.2 D8:U1.8
D8:N$10: D8:C41.1 D8:R41.1
D8:R31: D8:C31.1 D8:R31.1
D8:VB+: D8:C35.1 D8:R36.1 D8:R37.2
D8:VB-: D8:C45.1 D8:R46.2 D8:R47.1 D8:R48.2
GND: C1.2 C2.2 C3.1 C4.1 C5.2 C6.2 C7.2 C8.2 C9.2 C18.2 C19.1 C20.1 C35.2 D1:C1.1 D1:C2.1 D1:C7.2 D1:C32.1 D1:C34.1 D1:C35.2 D1:C42.1 D1:C44.1 D1:C45.2 D1:R46.1 D1:U1.6 D2:C1.1 D2:C2.1 D2:C7.2 D2:C32.1 D2:C34.1 D2:C35.2 D2:C42.1 D2:C44.1 D2:C45.2 D2:R46.1 D2:U1.6 D3:C1.1 D3:C2.1 D3:C7.2 D3:C32.1 D3:C34.1 D3:C35.2 D3:C42.1 D3:C44.1 D3:C45.2 D3:R46.1 D3:U1.6 D4:C1.1 D4:C2.1 D4:C7.2 D4:C32.1 D4:C34.1 D4:C35.2 D4:C42.1 D4:C44.1 D4:C45.2 D4:R46.1 D4:U1.6 D5:C1.1 D5:C2.1 D5:C7.2 D5:C32.1 D5:C34.1 D5:C35.2 D5:C42.1 D5:C44.1 D5:C45.2 D5:R46.1 D5:U1.6 D6:C1.1 D6:C2.1 D6:C7.2 D6:C32.1 D6:C34.1 D6:C35.2 D6:C42.1 D6:C44.1 D6:C45.2 D6:R46.1 D6:U1.6 D7:C1.1 D7:C2.1 D7:C7.2 D7:C32.1 D7:C34.1 D7:C35.2 D7:C42.1 D7:C44.1 D7:C45.2 D7:R46.1 D7:U1.6 D8:C1.1 D8:C2.1 D8:C7.2 D8:C32.1 D8:C34.1 D8:C35.2 D8:C42.1 D8:C44.1 D8:C45.2 D8:R46.1 D8:U1.6 R1.1 R3.1 R5.1 R7.1 R11.1 R15.2 R19.2 R20.1 R31.1 T1.TP T2.TP T3.TP T9.TP T10.TP T11.TP U1.10 U2.10 U3.13 U3.14 U3.15 U3.16 U3.EXP U4.2 U5.4 U5.5 U5.6 U5.7 U8.4 X1.1 X1.2 X1.5 X1.6 X1.9 X1.10 X1.13 X1.14 X1.17 X1.18 X1.21 X1.22 X1.25 X1.26 X1.29 X1.30 X1.33 X1.34 X1.39 X1.40 X2.2 X3.2 X4.4 X5.A1 X5.A4 X5.A7 X5.A10 X5.A13 X5.A16 X5.A19 X5.A22 X5.A25 X5.A28 X5.B1 X5.B2 X5.B3 X5.B4 X5.B5 X5.B6 X5.B7 X5.B8 X5.B9 X5.B10 X5.B11 X5.B12 X5.B13 X5.B14 X5.B15 X5.B16 X5.B17 X5.B18 X5.B19 X5.B20 X5.B21 X5.B22 X5.B23 X5.B24 X5.B25 X5.B26 X5.B27 X5.B28 X5.C1 X5.C4 X5.C7 X5.C10 X5.C13 X5.C16 X5.C19 X5.C22 X5.C25 X5.C28
HVIN: C35.1 HVIN.TP R8.1 R9.2 R17.1 U3.4 U3.5
IN0: D1:C41.2 D1:R47.2 X1.31
IN1: D2:C41.2 D2:R47.2 X1.27
IN2: D3:C41.2 D3:R47.2 X1.23
IN3: D4:C41.2 D4:R47.2 X1.19
IN4: D5:C41.2 D5:R47.2 X1.15
IN5: D6:C41.2 D6:R47.2 X1.11
IN6: D7:C41.2 D7:R47.2 X1.7
IN7: D8:C41.2 D8:R47.2 X1.3
IP0: D1:C31.2 D1:R37.1 X1.32
IP1: D2:C31.2 D2:R37.1 X1.28
IP2: D3:C31.2 D3:R37.1 X1.24
IP3: D4:C31.2 D4:R37.1 X1.20
IP4: D5:C31.2 D5:R37.1 X1.16
IP5: D6:C31.2 D6:R37.1 X1.12
IP6: D7:C31.2 D7:R37.1 X1.8
IP7: D8:C31.2 D8:R37.1 X1.4
LDAC1: LDAC1.TP R5.2 R6.1 U1.4
LDAC2: LDAC2.TP R11.2 R12.1 U2.4
N$1: C1.1 R4.1 R6.2 U1.1
N$2: IC1.1 R2.1 R3.2
N$3: LED1.C R1.2
N$4: LED2.C R7.2
N$5: R8.2 X3.1
N$7: R15.1 T14.TP U3.11
N$9: R17.2 U3.6
N$10: R13.1 U4.6
N$11: C2.1 R10.1 R12.2 U2.1
N$13: R16.1 T15.TP U3.1
N$20: IC2.1 R30.1 R31.2
ON0: D1:R45.2 X5.A12
ON1: D2:R45.2 X5.C12
ON2: D3:R45.2 X5.A9
ON3: D4:R45.2 X5.C9
ON4: D5:R45.2 X5.A6
ON5: D6:R45.2 X5.C6
ON6: D7:R45.2 X5.C3
ON7: D8:R45.2 X5.A3
OP0: D1:R35.2 X5.A11
OP1: D2:R35.2 X5.C11
OP2: D3:R35.2 X5.A8
OP3: D4:R35.2 X5.C8
OP4: D5:R35.2 X5.A5
OP5: D6:R35.2 X5.C5
OP6: D7:R35.2 X5.C2
OP7: D8:R35.2 X5.A2
PWRGND: R20.2 X5.A30 X5.B29 X5.B30 X5.C30
SCL: R38.1 SCL.TP U1.2 U2.2 U4.5 U5.2 U8.2
SCLEXT: R32.1 U8.3 X4.3 X5.C29
SDA: R37.1 SDA.TP U1.3 U2.3 U4.4 U5.1 U8.7
SDAEXT: R33.1 U8.6 X4.2 X5.A29
V5: C20.2 D1:C1.2 D1:C2.2 D1:U1.3 D2:C1.2 D2:C2.2 D2:U1.3 D3:C1.2 D3:C2.2 D3:U1.3 D4:C1.2 D4:C2.2 D4:U1.3 D5:C1.2 D5:C2.2 D5:U1.3 D6:C1.2 D6:C2.2 D6:U1.3 D7:C1.2 D7:C2.2 D7:U1.3 D8:C1.2 D8:C2.2 D8:U1.3 IC2.2 IC2.4 LED1.A R30.2 T17.TP
V5D: C4.2 C5.1 C6.1 C7.1 C8.1 C18.1 IC1.2 IC1.4 LED2.A R2.2 R4.2 R10.2 R13.2 R14.2 R16.2 R37.2 R38.2 T5.TP U3.3 U4.3 U5.8 U8.8
VBIAS: D1:R36.2 D2:R36.2 D3:R36.2 D4:R36.2 D5:R36.2 D6:R36.2 D7:R36.2 D8:R36.2 R9.1 U3.8 VB.TP
VEXT: R14.1 R32.2 R33.2 X4.1 X5.A32 X5.B32 X5.C32
VEXT2: X5.A31 X5.B31 X5.C31
VIN+: C3.2 C19.2 IC1.3 IC2.3 T4.TP X2.1
VTR1: D1:R48.1 U1.6
VTR2: D2:R48.1 U1.7
VTR3: D3:R48.1 U1.8
VTR4: D4:R48.1 U1.9
VTR5: D5:R48.1 U2.6
VTR6: D6:R48.1 U2.7
VTR7: D7:R48.1 U2.8
VTR8: D8:R48.1 U2.9